# Altium PCB Main.PcbDoc
Units mil, origin at the board's own origin, x right, y up, seen from the top; angles counter-clockwise.
Board outline 3149.61 x 3937.01 mil, 2 copper layers (Top Layer, Bottom Layer); 50 components, 56 nets, 219 pads, 54 vias.
Unrouted connection lines stored in the file: 7.
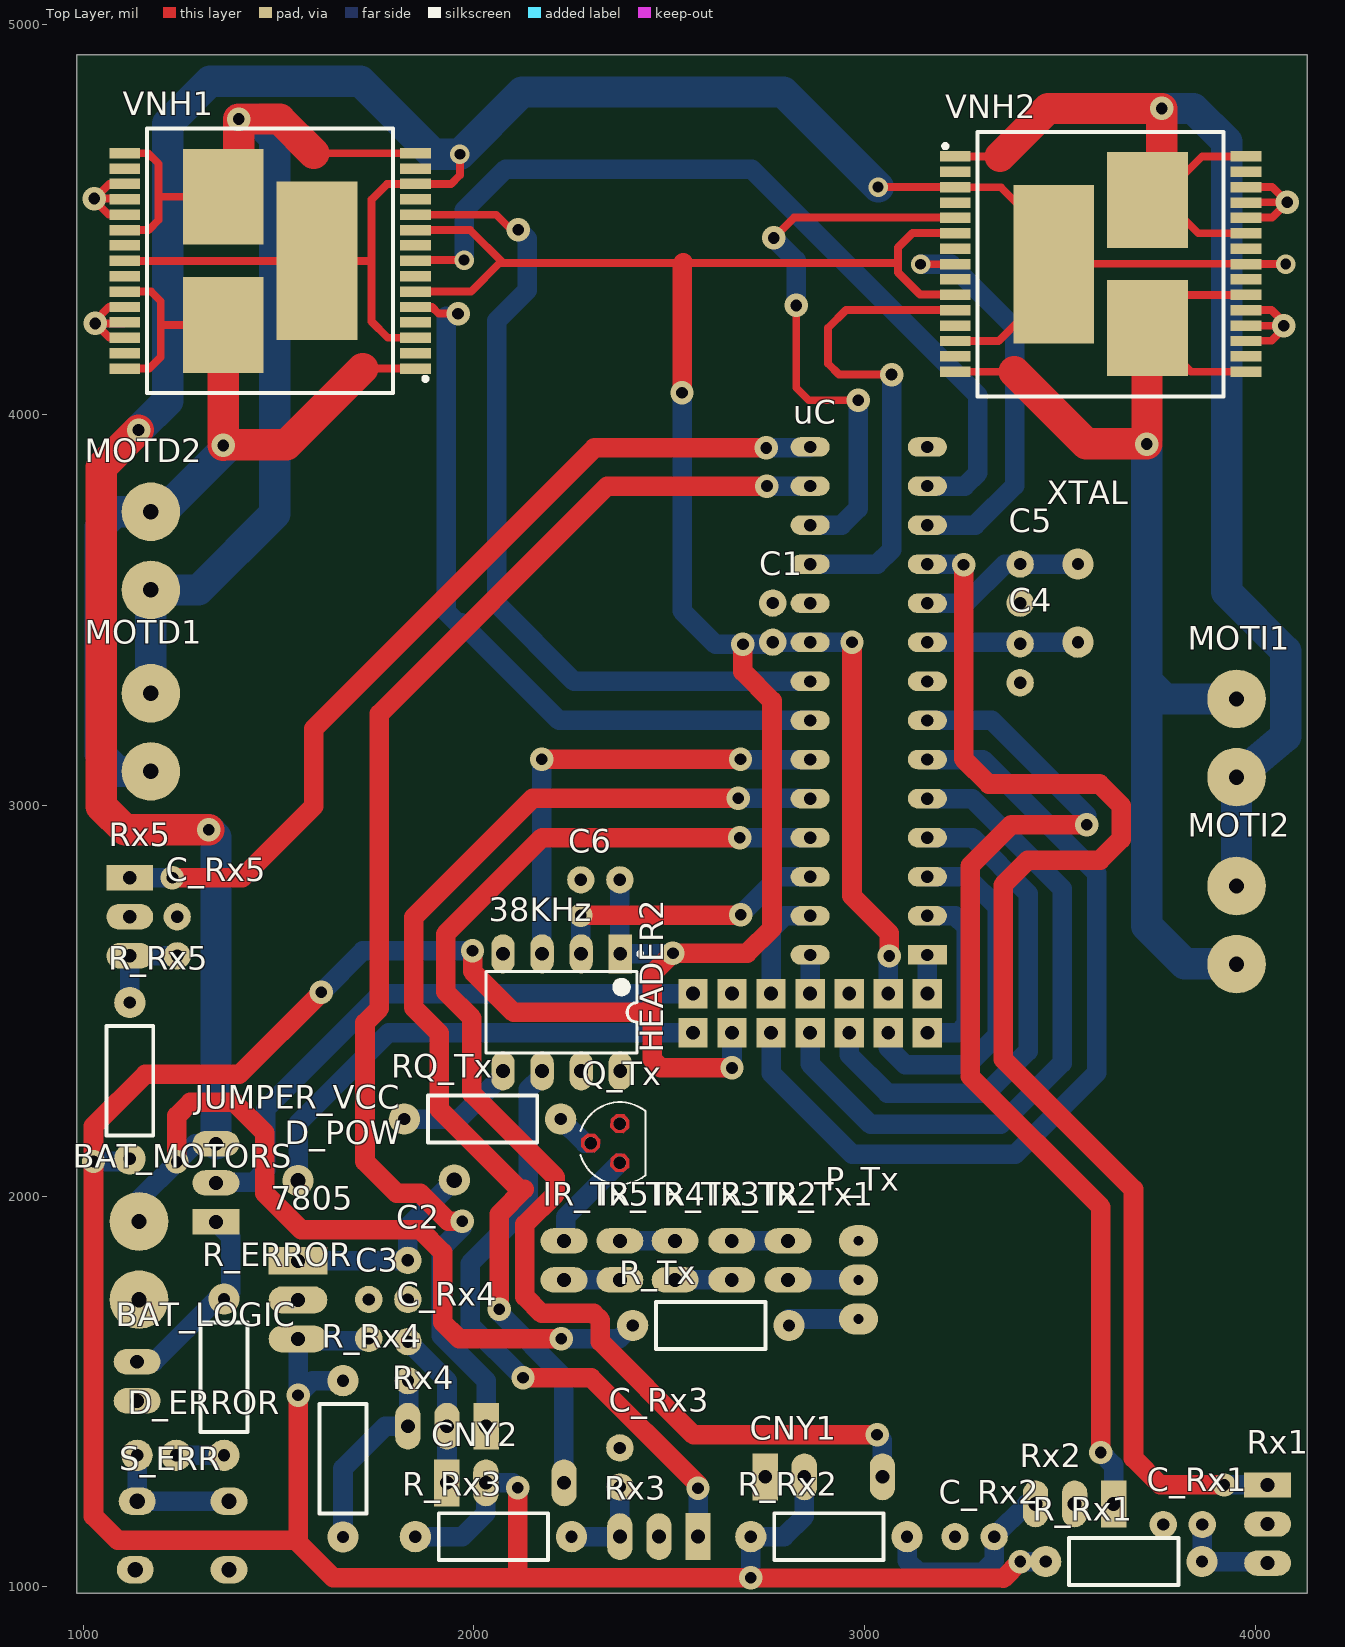
[diagram p0: Top Layer view]
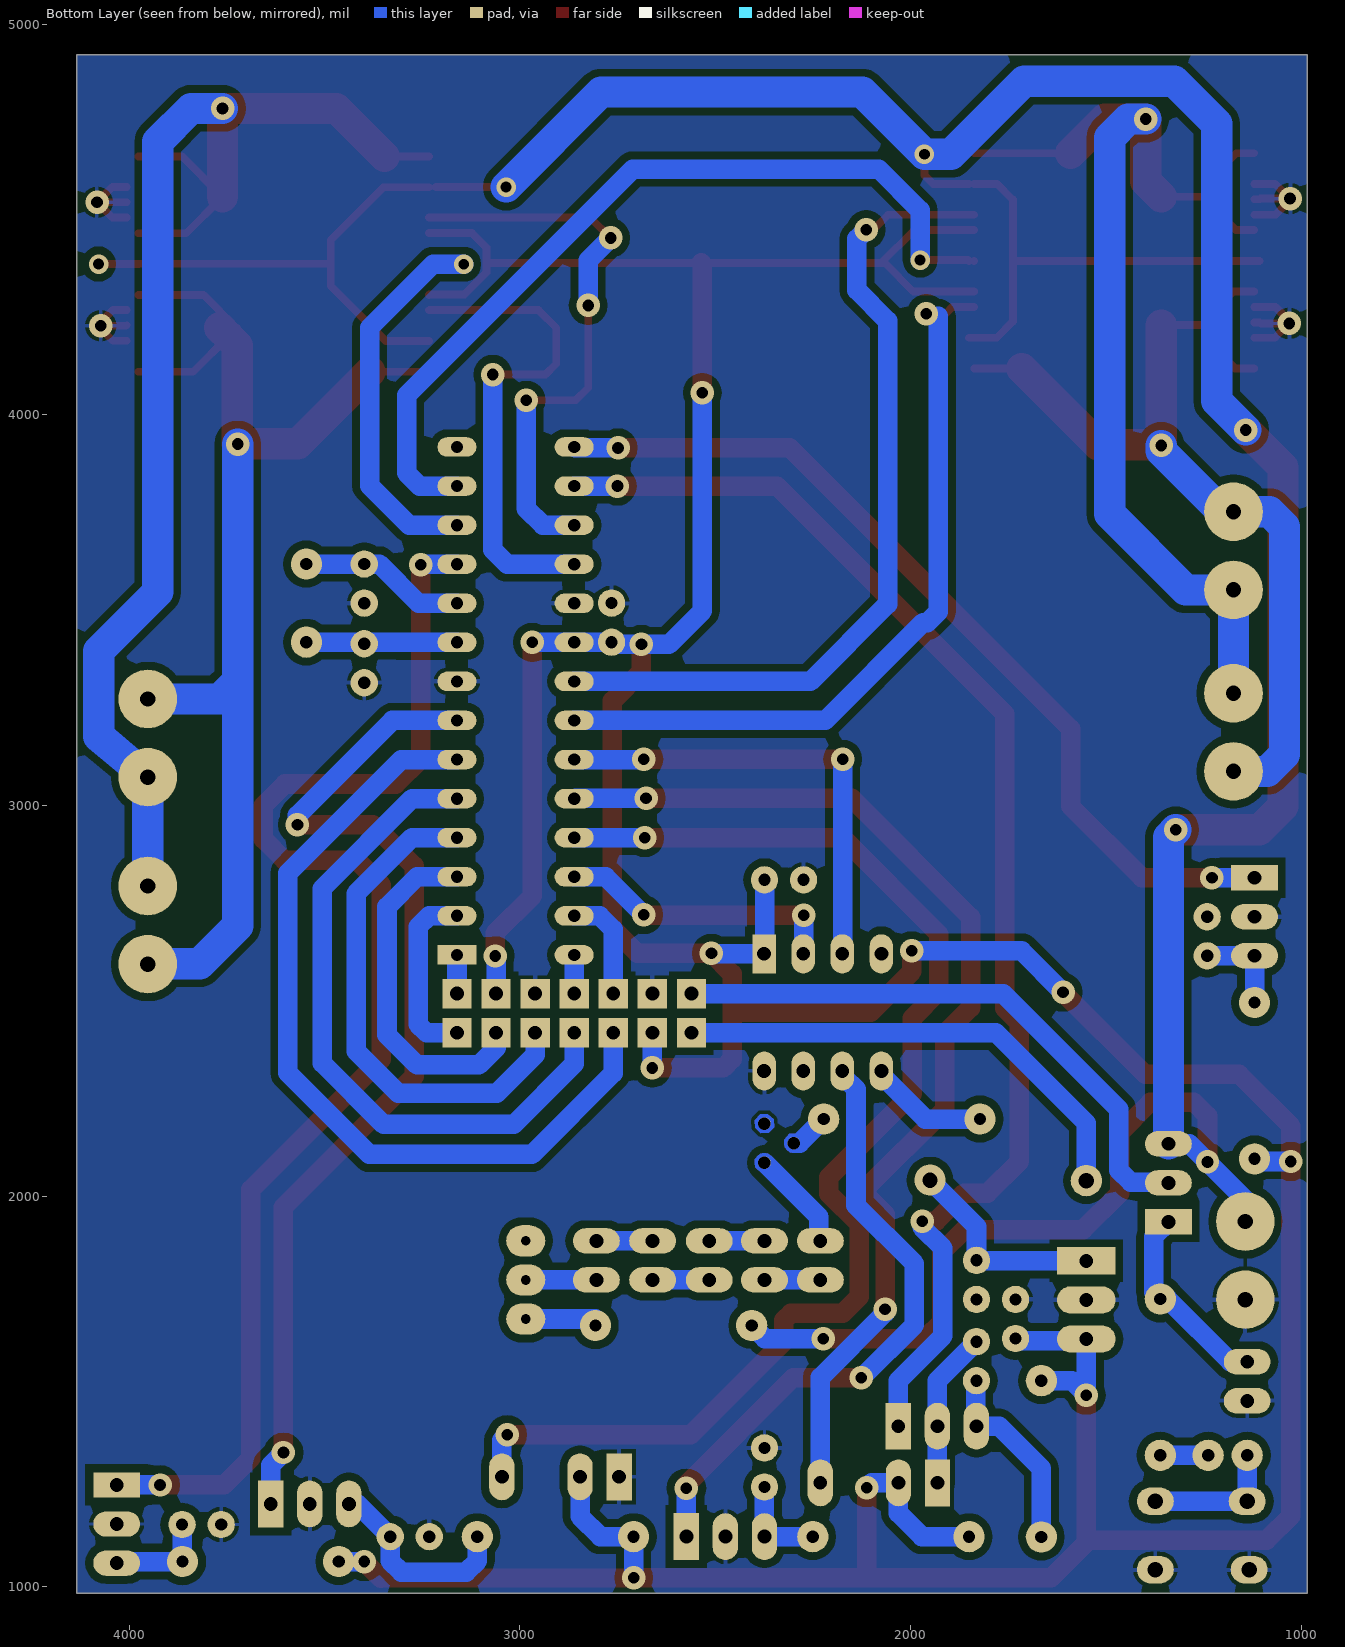
[diagram p1: Bottom Layer view, seen from below]

## Layer stack, top to bottom
Top Solder: solder mask 0.4, Solder Resist, Dk 3.5
Top Layer: signal copper 1.4
Dielectric 1: dielectric 12.6, FR-4, Dk 4.8
Bottom Layer: signal copper 1.4
Bottom Solder: solder mask 0.4, Solder Resist, Dk 3.5

## Board outline
984.25,984.25 4133.86,984.25 4133.86,4921.26 984.25,4921.26

## Design rules (kind name [scope] priority, off if disabled: settings)
Clearance [All] p1: gap=10 except(20: Arc-Poly Track-Poly SMDPad-Poly THPad-Poly Via-Poly Fill-Poly Poly-Poly)
PolygonConnect [All] p1: connectstyle=Relief reliefconductorwidth=10 reliefentries=4 polygonreliefangle="90 Angle" airgapwidth=10
RoutingVias [All] p1: holewidth=28 width=50 viastyle="Through Hole" minholewidth=28 minwidth=50 maxholewidth=28 maxwidth=50
SolderMaskExpansion [All] p1: expansion=4
Width [All] p1: maxlimit=1000 minlimit=10 preferedwidth=30
30 further rules are at their usual default settings.

## Components (designator, comment, footprint, x,y, rotation, side; value= is the part's Value field where it differs from the comment)
38KHz "PIC12F683-I/P" PDIP300-P8 2224.8,2470.47 r270 top
7805 "LM78XX" TO-220-STRAIGHT 1550.25,1834.65 r0 top
BAT_LOGIC "7,4v" "HEADER 1x2" 1138.44,1526.38 r0 top
BAT_MOTORS "11,1v" BLOCK_TERMINAL-2 698.31,1785.43 r0 top
C1 "CAP-CER" CAP-CER 2765.35,3453.15 r270 top
C2 "CAP-CER" CAP-CER 1831.35,1800.87 r90 top
C3 "CAP-CER" CAP-CER 1731.35,1670.87 r270 top
C4 "CAP-CER" CAP-CER 3398.42,3379.13 r90 top
C5 "CAP-CER" CAP-CER 3398.43,3583.11 r90 top
C6 "CAP-CER" CAP-CER 2339.02,2809.84 r0 top
C_Rx1 "CAP-CER" CAP-CER 3799.61,1159.84 r180 top
C_Rx2 "CAP-CER" CAP-CER 3266.89,1128.74 r180 top
C_Rx3 "CAP-CER" CAP-CER 2374.02,1320.87 r90 top
C_Rx4 "CAP-CER" CAP-CER 1831.5,1592.95 r90 top
C_Rx5 "CAP-CER" CAP-CER 1240.94,2680.35 r90 top
CNY1 "CNY_HEADER" CNY_HEADER 2896.06,1281.89 r90 top
CNY2 "CNY_HEADER" CNY_HEADER 2081.1,1266.54 r90 top
D_ERROR "LED" LED-3MM-RED 1188.44,1337.05 r0 top
D_POW "DIODE" DO-41 1775.24,2041.34 r180 top
HEADER2 "Header 2x7" "HEADER 2x7" 3161.02,2518.5 r270 top
IR_Tx1 "IR383" "HEADER 1x2" 2804.33,1835.83 r180 top
IR_Tx2 "IR383" "HEADER 1x2" 2660.24,1835.83 r0 top
IR_Tx3 "IR383" "HEADER 1x2" 2515.35,1835.83 r0 top
IR_Tx4 "IR383" "HEADER 1x2" 2374.02,1835.83 r180 top
IR_Tx5 "IR383" "HEADER 1x2" 2231.1,1835.83 r0 top
JUMPER_VCC "Header 1x3" "Header 1x3" 1340.16,1934.25 r180 top
MOTD1 "2-BLOCK_TERMINAL" BLOCK_TERMINAL-2 728.62,3137.4 r0 top
MOTD2 "2-BLOCK_TERMINAL" BLOCK_TERMINAL-2 728.62,3601.97 r0 top
MOTI1 "2-BLOCK_TERMINAL" BLOCK_TERMINAL-2 4397.36,3222.83 r180 top
MOTI2 "2-BLOCK_TERMINAL" BLOCK_TERMINAL-2 4397.36,2744.09 r180 top
P_Tx "POT" POT-10TURN 2985.04,1785.83 r90 top
Q_Tx "NPN" TO-92 2336.52,2135.83 r90 top
R_ERROR "RES" RES-Axial-400mil 1360.88,1337.05 r90 top
R_Rx1 "RES" RES-Axial-400mil 3463.78,1064.96 r0 top
R_Rx2 "RES" RES-Axial-400mil 2709.06,1128.74 r0 top
R_Rx3 "RES" RES-Axial-400mil 1850.39,1128.74 r0 top
R_Rx4 "RES" RES-Axial-400mil 1665.35,1527.95 r270 top
R_Rx5 "RES" RES-Axial-400mil 1119.68,2095.67 r90 top
R_Tx "RES" RES-Axial-400mil 2806.69,1669.29 r180 top
RQ_Tx "RES" RES-Axial-400mil 1822.44,2197.64 r0 top
Rx1 "Header 1x3" "Header 1x3" 4031.89,1261.02 r0 top
Rx2 "Header 1x3" "Header 1x3" 3637.8,1212.6 r270 top
Rx3 "Header 1x3" "Header 1x3" 2574.02,1128.74 r270 top
Rx4 "Header 1x3" "Header 1x3" 2031.5,1411.42 r270 top
Rx5 "Header 1x3" "Header 1x3" 1119.68,2815.35 r0 top
S_ERR "BUTTON_SMALL_4PIN" TACT_SWITCH-SMALL-4PIN 1353.58,1219.29 r180 top
uC "PIC18F2550" DIP28 3161.02,2617.72 r180 top
VNH1 "VNH2SP30-E" MULTIPOWER-SO-30 1478.74,4394.09 r90 top
VNH2 "VNH2SP30-E" MULTIPOWER-SO-30 3604.33,4385.83 r270 top
XTAL "XTAL" HC-49/S 3546.46,3538.11 r270 top

## Footprints (in the part's own frame and the unit in brackets; to place one, negate y for a bottom-side part, rotate by r counter-clockwise, add the part's x,y. Pads: shape width x height; smd on the part's side, far side on the other; paste and mask are expansions set on the pad)
BLOCK_TERMINAL-2 [mil]
  round 150 hole 39.37: 1(445,150) 2(445,-50)
  body extent 265,-147 580,247, height 400
CAP-CER [mil]
  round 70 hole 31.5: 1(-65,0) 2(35,0)
  body extent -107,-44 87,34, height 207
CNY_HEADER [mil]
  rect 120x65 hole 35.43: 1(0,150)
  oval 120x65 hole 35.43: 2(0,50) 3(0,-150)
  body extent -49,-200 49,200, height 336
DIP28 [mm]
  rect 2.54x1.27 hole 0.8: 1(0,0)
  oval 2.54x1.27 hole 0.8: 2(0,-2.54) 3(0,-5.08) 4(0,-7.62) 5(0,-10.16) 6(0,-12.7) 7(0,-15.24) 8(0,-17.78) 9(0,-20.32) 10(0,-22.86) 11(0,-25.4) 12(0,-27.94) 13(0,-30.48) 14(0,-33.02) 15(7.62,-33.02) 16(7.62,-30.48) 17(7.62,-27.94) 18(7.62,-25.4) 19(7.62,-22.86) 20(7.62,-20.32) 21(7.62,-17.78) 22(7.62,-15.24) 23(7.62,-12.7) 24(7.62,-10.16) 25(7.62,-7.62) 26(7.62,-5.08) 27(7.62,-2.54) 28(7.62,0)
  body extent -0.25,-33.76 7.65,0.89, height 5.09
DO-41 [mil]
  round 80 hole 39.37: A(224.99,1.45) K(-175,0)
  body extent -192,-52 242,55, height 107
HC-49/S [mil]
  round 80 hole 31.5: 1(-80,0) 2(120,0)
  body extent -203,-90 243,93, height 138
"HEADER 1x2" [mil]
  oval 120x65 hole 35.43: 1(0,50) 2(0,-50)
  body extent -49,-100 49,100, height 336
"Header 1x3" [mil]
  rect 120x65 hole 35.43: 1(0,0)
  oval 120x65 hole 35.43: 2(0,-100) 3(0,-200)
  body extent -49,-250 49,50, height 336
"HEADER 2x7" [mm]
  rect 1.905x1.905 hole 0.9: 1(0,0) 2(2.54,0) 3(0,-2.54) 4(2.54,-2.54) 5(0,-5.08) 6(2.54,-5.08) 7(0,-7.62) 8(2.54,-7.62) 9(0,-10.16) 10(2.54,-10.16) 11(0,-12.7) 12(2.54,-12.7) 13(0,-15.24) 14(2.54,-15.24)
  body extent -1.24,-16.51 3.78,1.27, height 8.54
LED-3MM-RED [mil]
  round 80 hole 31.5: A(-50,0) K(50,0)
  body extent -66,-65 64,65, height 217
MULTIPOWER-SO-30 [mm]
  rect 0.68x2 smd: 1(-7,-9.45) 2(-6,-9.45) 3(-5,-9.45) 4(-4,-9.45) 5(-3,-9.45) 6(-2,-9.45) 7(-1,-9.45) 8(0,-9.45) 9(1,-9.45) 10(2,-9.45) 11(3,-9.45) 12(4,-9.45) 13(5,-9.45) 14(6,-9.45) 15(7,-9.45) 16(7,9.45) 17(6,9.45) 18(5,9.45) 19(4,9.45) 20(3,9.45) 21(2,9.45) 22(1,9.45) 23(0,9.45) 24(-1,9.45) 25(-2,9.45) 26(-3,9.45) 27(-4,9.45) 28(-5,9.45) 29(-6,9.45) 30(-7,9.45)
  rect 6.23x5.25 smd: 31(-4.165,3.05) 32(4.165,3.05)
  rect 10.3x5.25 smd: 33(0,-3.05)
  silkscreen extent -8.6,-10.23 8.6,8
PDIP300-P8 [mil] "DIP, 8-Leads, Row Spacing 7.62mm, Pitch 2.54mm, Body 9.5x6.6mm"
  rect 100x60 hole 35.43: 1(-150,150)
  oval 100x60 hole 35.43: 2(-150,50) 3(-150,-50) 4(-150,-150) 5(150,-150) 6(150,-50) 7(150,50) 8(150,150)
  silkscreen extent -155,-193 104,206, body extent -140,-193 140,193, height 210
POT-10TURN [mil]
  oval 80x100 hole 25: 1(-100,0) 2(0,0) 3(100,0)
  body extent -188,-94 188,94, height 455
RES-Axial-400mil [mil]
  round 80 hole 31.5: 1(0,0) 2(400,0)
  silkscreen extent 60,-60 340,60, body extent -12,-44 410,44, height 94
TACT_SWITCH-SMALL-4PIN [mm]
  oval 2.4x1.8 hole 1: 1(-0.508,4.445) 1(5.588,4.445) 2(-0.508,0) 2(5.461,0)
  body extent -1.45,-0.79 6.53,5.21, height 5.15
TO-92 [mil]
  round 32 hole 32: B(0,37.5) C(-50,-37.5) E(50,-37.5)
  Top Layer region: -25.57,-28.61 -39.01,-13.94 -58.89,-13.07 -73.56,-26.51 -74.43,-46.39 -60.99,-61.06 -41.11,-61.93 -26.44,-48.49
  Top Layer region: 24.43,46.39 10.99,61.06 -8.89,61.93 -23.56,48.49 -24.43,28.61 -10.99,13.94 8.89,13.07 23.56,26.51
  Top Layer region: 74.43,-28.61 60.99,-13.94 41.11,-13.07 26.44,-26.51 25.57,-46.39 39.01,-61.06 58.89,-61.93 73.56,-48.49
  Bottom Layer region: -25.57,-28.61 -39.01,-13.94 -58.89,-13.07 -73.56,-26.51 -74.43,-46.39 -60.99,-61.06 -41.11,-61.93 -26.44,-48.49
  Bottom Layer region: 24.43,46.39 10.99,61.06 -8.89,61.93 -23.56,48.49 -24.43,28.61 -10.99,13.94 8.89,13.07 23.56,26.51
  Bottom Layer region: 74.43,-28.61 60.99,-13.94 41.11,-13.07 26.44,-26.51 25.57,-46.39 39.01,-61.06 58.89,-61.93 73.56,-48.49
  Multi-Layer region: -25.57,-28.61 -39.01,-13.94 -58.89,-13.07 -73.56,-26.51 -74.43,-46.39 -60.99,-61.06 -41.11,-61.93 -26.44,-48.49
  Multi-Layer region: 24.43,46.39 10.99,61.06 -8.89,61.93 -23.56,48.49 -24.43,28.61 -10.99,13.94 8.89,13.07 23.56,26.51
  Multi-Layer region: 74.43,-28.61 60.99,-13.94 41.11,-13.07 26.44,-26.51 25.57,-46.39 39.01,-61.06 58.89,-61.93 73.56,-48.49
  silkscreen extent -105,-102 105,63, body extent -95,-77 95,58, height 290
TO-220-STRAIGHT [mil]
  rect 150x70 hole 35.43: 1(0,0)
  oval 150x70 hole 35.43: 2(0,-100) 3(0,-200)
  body extent -64,-305 114,101, height 661

## Part data
38KHz: "Flash-Based 8-Bit CMOS Microcontroller with nanoWatt Technology, 2K (x14-Bit words) Program Memory, 384 Bytes Data Memory, 8-Pin PDIP, Industrial Temperature"
BAT_LOGIC IR_Tx1 IR_Tx2 IR_Tx3 IR_Tx4 IR_Tx5: library part "Header 1x2"
BAT_MOTORS: library part 2-BLOCK_TERMINAL
VNH1 VNH2: "H-Bridge Motor Driver 30A MultiPowerSO30 STMicroelectronics VNH2SP30-E, Half Bridge Motor Driver, Automotive, 30-Pin SOIC"

## Via types
v1: diameter 60, hole 30, Top Layer to Bottom Layer, 49 vias
v2: diameter 50, hole 28, Top Layer to Bottom Layer, 5 vias

## Nets (pads, with @x,y where several pads share a name; then routed paths per layer and width w, separated by ;. In a path a pad name is that pad's centre, name@x,y a point inside that pad or via, vN(x,y) a via of type N, cw(c..) or ccw(c..) an arc to the next point about the centre after c; other vN are vias at no path point)
5V: 38KHz.1 7805.3 C1.2 C3.2 C6.2 CNY1.2 CNY2.2 HEADER2.3 HEADER2.12 R_Rx1.1 R_Rx2.1 R_Rx3.1 R_Rx4.1 R_Rx5.1 uC.20 VNH1.6 VNH1.10 VNH2.6 VNH2.10 | length 13375
  Top Layer w20: VNH1.6@1837.01,4315.35 VNH1.6 1992.91,4315.35 2066.54,4388.98 2074.8,4388.98 ; VNH1.10@1837.01,4472.83 VNH1.10 1990.94,4472.83 2074.8,4388.98 ; VNH2.10 3231.5,4307.87 3142.13,4307.87 3085.83,4364.17 3085.83,4388.98 ; VNH2.6@3232.28,4465.35 3122.83,4465.35 3085.83,4428.35 3085.83,4388.98 ; 2074.8,4388.98 2536.42,4388.98 3085.83,4388.98
  Top Layer w50: v1(1550.25,1490.8) 1550.25,1113.53 ; v1(1609.84,2522.05) 1400,2312.2 1159.45,2312.2 1026.77,2179.53 v1(1026.77,2088.98) 1026.77,1181.5 1088.54,1119.72 1544.06,1119.72 1550.25,1113.53 ; v1(1996.85,2628.35) 1996.85,2575.59 2101.97,2470.47 2456.69,2470.47 ; v1(2112.6,1253.94) 2112.6,1023.23 ; v1(2533.07,4056.69) 2533.07,4385.63 2536.42,4388.98 ; v1(2661.02,2328.35) 2479.13,2328.35 2456.69,2350.79 2456.69,2470.47 ; v1(2688.98,3412.6) 2688.98,3342.52 2763.39,3268.11 2763.39,2685.83 2699.61,2622.05 v1(2509.84,2622.05) 2456.69,2568.9 2456.69,2470.47 ; v1(2968.11,3417.72) 2968.11,2768.9 3063.39,2673.62 v1(3063.39,2614.96) ; v1(3398.43,1064.96) 3355.51,1022.05 v1(2708.66,1023.23) 2112.6,1023.23 ; 1550.25,1113.53 1640.55,1023.23 2112.6,1023.23
  Bottom Layer w50: v1(1026.77,2088.98) 1112.99,2088.98 R_Rx5.1 ; v1(1609.84,2522.05) 1716.14,2628.35 v1(1996.85,2628.35) ; R_Rx4.1 1587.4,1527.95 v1(1550.25,1490.8) 7805.3 1554.64,1630.26 1725.74,1630.26 C3.2 C3.2@1731.35,1637.05 ; R_Rx3.1@1843.7,1122.05 R_Rx3.1 1970.87,1128.74 2031.1,1188.98 CNY2.2 2100,1266.54 v1(2112.6,1253.94) ; C6.2@2373.58,2809.84 2373.58,2621.69 38KHz.1 2508.27,2620.47 v1(2509.84,2622.05) ; v1(2533.07,4056.69) 2533.07,3498.43 2618.9,3412.6 v1(2688.98,3412.6) C1.2@2762.6,3412.6 ; v1@2659.84,2327.17 v1(2661.02,2328.35) HEADER2.12 ; v1(2708.66,1023.23) R_Rx2.1 2794.09,1128.74 2846.06,1180.71 CNY1.2 ; C1.2@2763.39,3411.81 C1.2@2762.6,3412.6 ; C1.2 2762.64,3420.87 C1.2@2759.49,3417.72 ; v1(2968.11,3417.72) uC.20 C1.2@2759.49,3417.72 ; HEADER2.3 3061.02,2612.6 v1(3063.39,2614.96) ; v1(3398.43,1064.96) R_Rx1.1 ; C1.2@2759.06,3416.14 2757.48,3417.72 C1.2@2759.49,3417.72 ; C1.2@2759.06,3416.14 2759.06,3417.28 C1.2@2759.49,3417.72 ; C1.2@2759.06,3416.14 C1.2@2762.6,3412.6
7V4: BAT_LOGIC.1 JUMPER_VCC.1 R_ERROR.2 | length 508.9
  Bottom Layer w50: BAT_LOGIC.1 1181.75,1576.38 1342.42,1737.05 R_ERROR.2 1377.95,1754.12 1377.95,1896.46 JUMPER_VCC.1
11V1: BAT_MOTORS.1 JUMPER_VCC.3 R_Tx.2 VNH1.3 VNH1.13 VNH1.23 VNH1.33 VNH2.3 VNH2.13 VNH2.23 VNH2.33 | length 10017.5
  Top Layer w20: VNH1.23 VNH1.33 1738.19,4394.09 ; VNH1.13@1837.01,4590.94 1778.35,4590.94 1738.19,4550.79 1738.19,4394.09 ; VNH1.3 1779.92,4197.24 1738.19,4238.98 1738.19,4394.09 ; VNH1.13 1942.13,4590.94 1964.57,4613.39 v2(1964.57,4666.93) ; v2(3035.04,4583.07) VNH2.3@3215.35,4583.07 ; VNH2.13 3343.31,4188.98 3484.25,4329.92 VNH2.33 VNH2.33@3484.25,4386.61 ; VNH2.3 3349.21,4582.68 3484.25,4447.64 VNH2.33@3484.25,4386.61 ; VNH2.23 v2(4078.35,4385.83) ; VNH2.23@4006.3,4386.61 VNH2.33@3484.25,4386.61
  Top Layer w50: v1(1240.16,2087.8) 1240.16,2205.91 1274.8,2240.55 1386.61,2240.55 1465.25,2161.91 1465.25,2007.58 1558.27,1914.57 1862.6,1914.57 1920.47,1856.69 1920.47,1677.56 1957.5,1640.54 1963.02,1635.04 1963.37,1635.39 2078.5,1635.39 ; 2078.5,1635.43 v1(2223.62,1635.43)
  Top Layer w80: v1(1142.13,3961.02) 1046.85,3865.75 1046.85,2998.03 1107.09,2937.8 v1(1321.65,2937.8)
  Bottom Layer w50: BAT_MOTORS.1@1138.44,1935.83 1144.88,1942.27 1144.88,1992.52 v1(1240.16,2087.8) 1286.61,2134.25 JUMPER_VCC.3 ; JUMPER_VCC.3@1358.13,2138.58 JUMPER_VCC.3@1360.88,2135.83 ; v1(2223.62,1635.43) 2372.83,1635.43 R_Tx.2
  Bottom Layer w80: v1(1142.13,3961.02) 1216.54,4035.43 1216.54,4744.88 1325.2,4853.54 1709.84,4853.54 1896.46,4666.93 v2(1964.57,4666.93) 2123.62,4825.98 2792.13,4825.98 v2(3035.04,4583.07) ; v1(1321.65,2937.8) 1340.16,2919.29 JUMPER_VCC.3
38KHZ: 38KHz.5 RQ_Tx.1 | length 309.2
  Bottom Layer w50: RQ_Tx.1 1962.2,2197.64 2074.8,2310.24 38KHz.5
BAT: HEADER2.13 JUMPER_VCC.2 | length 1512.1
  Bottom Layer w50: JUMPER_VCC.2@1340.16,2035.83 1436.22,2035.83 1467.32,2066.93 1467.32,2222.83 1762.99,2518.5 HEADER2.13
BTN1: HEADER2.4 uC.3 | length 906.5
  Bottom Layer w50: HEADER2.4 3061.02,2379.86 3104.88,2336 3263.17,2336 3340.16,2412.99 3340.16,2740.55 3262.99,2817.72 uC.3
BTN2: HEADER2.2 uC.2 | length 468.8
  Bottom Layer w50: HEADER2.2 3238.98,2418.5 3260.24,2439.76 3260.24,2689.76 3232.28,2717.72 uC.2
CNY1: CNY1.3 uC.25 | length 3304.6
  Top Layer w50: v1(2680.71,2917.72) 2174.8,2917.72 1927.95,2670.87 1927.95,2523.43 1995.28,2456.11 1995.28,2262.99 2209.06,2049.21 2209.06,2006.3 2131.1,1928.35 2131.1,1743.31 2173.98,1700.43 2306.65,1700.43 2324.33,1682.76 2324.33,1628.03 2562.99,1389.37 v1(3032.28,1389.37)
  Bottom Layer w50: v1(2680.71,2917.72) uC.25 ; v1(3032.28,1389.37) 3046.06,1375.59 CNY1.3
CNY2: CNY2.3 uC.24 | length 2794.1
  Top Layer w50: v1@2065.35,1712.2 2065.35,1954.52 2129.13,2018.3 2116.34,2018.3 1912.2,2222.44 1912.2,2416.93 1846.06,2483.07 1846.06,2713.78 2151.18,3018.9 v1(2677.17,3018.9)
  Bottom Layer w50: v1(2065.35,1710.63) 2065.35,1701.78 2230.71,1536.42 CNY2.3@2230.71,1275.2 ; v1(2677.17,3018.9) uC.24@2857.09,3018.9
GND: 38KHz.8 7805.2 BAT_LOGIC.2 BAT_MOTORS.2 C1.1 C2.1 C3.1 C4.1 C5.1 C6.1 C_Rx1.2 C_Rx2.2 C_Rx3.2 C_Rx4.2 C_Rx5.2 CNY1.1 CNY2.1 HEADER2.5 HEADER2.11 Q_Tx.E Rx1.2 Rx2.2 Rx3.2 Rx4.2 Rx5.2 S_ERR.1 uC.8 uC.19 VNH1.18 VNH1.19 VNH1.20 VNH1.26 VNH1.27 VNH1.28 VNH2.18 VNH2.19 VNH2.20 VNH2.26 VNH2.27 VNH2.28 | length 1523.8
  Top Layer w20: VNH1.28@1120.47,4197.24 VNH1.28 1067.72,4197.24 v1(1031.1,4233.86) ; VNH1.27@1120.47,4236.61 VNH1.27 1103.94,4233.86 v1(1031.1,4233.86) ; VNH1.26@1120.47,4275.98 VNH1.26 1066.14,4275.98 1031.1,4240.94 v1(1031.1,4233.86) ; VNH1.20@1120.47,4512.2 VNH1.20 1066.14,4512.2 1028.74,4549.61 v1(1028.74,4553.54) v1@1029.53,4553.54 ; VNH1.19@1120.47,4551.57 VNH1.19 1104.72,4553.54 v1@1029.53,4553.54 ; VNH1.18@1120.47,4590.94 VNH1.18 1066.93,4590.94 v1@1029.53,4553.54 ; VNH2.18@4006.3,4189.76 4041.73,4189.76 4072.83,4220.87 v1(4072.83,4227.95) ; VNH2.19@4006.3,4229.13 4007.48,4227.95 v1(4072.83,4227.95) ; VNH2.20@4006.3,4268.5 4041.73,4268.5 4072.83,4237.4 v1(4072.83,4227.95) ; VNH2.26@4006.3,4504.72 4042.91,4504.72 v1(4082.28,4544.09) ; VNH2.27@4006.3,4544.09 v1(4082.28,4544.09) ; VNH2.28@4006.3,4583.46 4042.91,4583.46 v1(4082.28,4544.09)
  Bottom Layer w50: C_Rx4.2 1931.5,1527.95 Rx4.2 1931.5,1266.93 CNY2.1 ; HEADER2.11@2659.84,2519.68 HEADER2.11
IR1: Rx1.1 uC.11 | length 3456.3
  Top Layer w50: v1(3253.62,3616.54) 3253.62,3119.61 3318.11,3055.12 3601.57,3055.12 3656.69,3000 3656.69,2913.78 3603.15,2860.24 3418.5,2860.24 3354.72,2796.46 3354.72,2351.18 3688.58,2017.32 3688.58,1329.53 3757.09,1261.02 v1(3920.87,1261.02)
  Bottom Layer w50: uC.11 3252.44,3617.72 v1(3253.62,3616.54) ; v1(3920.87,1261.02) Rx1.1
IR2: Rx2.1 uC.7 | length 2660
  Top Layer w50: v1(3569.29,2951.18) 3376.38,2951.18 3270.47,2845.28 3270.47,2307.09 3605.12,1972.44 v1(3605.12,1344.09)
  Bottom Layer w50: uC.7 3326.38,3217.72 3569.29,2974.8 v1(3569.29,2951.18) ; v1(3605.12,1344.09) 3637.8,1311.42 Rx2.1
IR3: 38KHz.6 Rx3.1 | length 1590.5
  Top Layer w50: v1(2125.98,1535.43) 2300.51,1535.43 2574.02,1261.93 v1(2574.02,1252.76)
  Bottom Layer w50: v1(2125.98,1535.43) 1990.55,1670.87 1990.55,1827.56 2139.8,1976.81 2139.8,2274.06 38KHz.6@2167.72,2301.97 ; Rx3.1 v1(2574.02,1252.76)
IR3_COPY: 38KHz.2 uC.26 | length 728.3
  Top Layer w50: v1(2273.62,2719.29) v1@2683.07,2719.29
  Bottom Layer w50: v1(2273.62,2719.29) 2273.62,2624.8 2276.38,2622.05 38KHz.2 ; v1(2683.07,2720.47) 2780.31,2817.72 uC.26
IR4: Rx4.1 uC.16 | length 3411.1
  Top Layer w50: v1(1970.47,1936.22) 1934.65,1936.22 1862.99,2007.87 1802.76,2007.87 1721.65,2088.98 1721.65,2443.7 1758.66,2480.71 1758.66,3234.65 2341.73,3817.72 v1(2750.39,3817.72)
  Bottom Layer w50: v1(1970.47,1936.22) 1970.47,1920.47 1917.32,1867.32 1917.32,1642.52 2031.5,1528.35 Rx4.1 ; v1(2750.39,3817.72) uC.16
IR5: Rx5.1 uC.15 | length 2314.4
  Top Layer w50: v1(1228.74,2815.35) 1407.87,2815.35 1590.16,2997.64 1590.16,3196.46 2309.06,3915.35 v1(2748.82,3915.35)
  Bottom Layer w50: Rx5.1 v1(1228.74,2815.35) ; v1(2748.82,3915.35) 2858.66,3915.35 uC.15
IR_SWITCH: 38KHz.3 uC.23 | length 1185.4
  Top Layer w50: v1(2174.02,3118.5) v1(2682.68,3118.5)
  Bottom Layer w50: 38KHz.3@2174.02,2620.47 v1(2174.02,3118.5) ; v1(2682.68,3118.5) 2683.47,3117.72 uC.23
LED1: HEADER2.10 uC.6 | length 2173.5
  Bottom Layer w50: HEADER2.10 2761.02,2315.35 2969.29,2107.09 3385.43,2107.09 3594.09,2315.75 3594.09,2826.77 3303.15,3117.72 uC.6
LED2: HEADER2.8 uC.5 | length 1740.7
  Bottom Layer w50: HEADER2.8 2861.02,2338.58 3015.75,2183.86 3348.82,2183.86 3505.91,2340.94 3505.91,2787.4 3275.59,3017.72 uC.5
LED3: HEADER2.6 uC.4 | length 1320
  Bottom Layer w50: HEADER2.6 2961.02,2361.81 3058.66,2264.17 3311.81,2264.17 3418.9,2371.26 3418.9,2774.8 3275.98,2917.72 uC.4
MCLR: HEADER2.1 uC.1 | length 99.2
  Bottom Layer w50: HEADER2.1 uC.1
MOT1A: MOTD1.2 MOTD2.1 VNH1.1 VNH1.25 VNH1.30 VNH1.31 | length 2491
  Top Layer w20: VNH1.30@1120.47,4118.5 1169.68,4118.5 1199.02,4147.83 1199.02,4230.12 ; VNH1.25@1120.47,4315.35 1174.41,4315.35 1199.02,4290.75 1199.02,4230.12 ; v1(1358.66,3921.65) v1@1360.24,3923.23 ; VNH1.31 1199.02,4230.12 ; 1715.75,4118.5 VNH1.1@1837.01,4118.5
  Top Layer w80: v1(1358.66,3921.65) VNH1.31 ; v1@1360.24,3923.23 1520.47,3923.23 1715.75,4118.5
  Bottom Layer w80: MOTD1.2 1087.4,3087.4 1043.31,3131.5 1043.31,3713.78 1081.5,3751.97 MOTD2.1 1203.15,3751.97 1358.66,3907.48 v1(1358.66,3921.65)
MOT1B: MOTD1.1 MOTD2.2 VNH1.15 VNH1.16 VNH1.21 VNH1.32 | length 2903.7
  Top Layer w20: VNH1.21@1120.47,4472.83 1167.32,4472.83 1193.5,4499.02 1193.5,4558.07 ; VNH1.16@1120.47,4669.69 1166.14,4669.69 1193.5,4642.32 1193.5,4558.07 ; VNH1.32 1193.5,4558.07 ; 1590.55,4669.69 VNH1.15@1837.01,4669.69
  Top Layer w80: VNH1.32 1398.43,4597.83 v1(1398.43,4757.09) 1503.15,4757.09 1590.55,4669.69
  Bottom Layer w80: MOTD1.1 MOTD2.2 1295.67,3551.97 1490.55,3746.85 1490.55,4709.45 1442.91,4757.09 v1(1398.43,4757.09)
MOT2A: MOTI1.1 MOTI2.2 VNH2.1 VNH2.25 VNH2.30 VNH2.31 | length 3545.7
  Top Layer w20: VNH2.1 3346.85,4661.42 ; VNH2.25 3854.13,4464.57 3761.02,4557.68 3864.76,4661.42 VNH2.30
  Top Layer w80: 3346.85,4661.42 3469.69,4784.25 v1(3761.02,4784.25) VNH2.31@3761.02,4557.68
  Bottom Layer w80: v1(3761.02,4784.25) 3841.73,4784.25 3927.17,4698.82 3927.17,3546.46 4077.95,3395.67 4077.95,3177.43 3965.7,3083.65 MOTI1.1@3952.76,3072.83 ; MOTI2.2 MOTI1.1
MOT2B: MOTI1.2 MOTI2.1 VNH2.15 VNH2.16 VNH2.21 VNH2.32 | length 3219.9
  Top Layer w20: VNH2.15 3383.46,4110.24 ; VNH2.16 3836.02,4110.24 3745.87,4200.39 VNH2.32 3809.65,4307.09 VNH2.21
  Top Layer w80: 3383.46,4110.24 3567.72,3925.98 3723.23,3925.98 3723.23,4177.76 3745.87,4200.39 VNH2.32@3768.11,4222.64
  Bottom Layer w80: v1(3722.44,3925.2) 3722.44,3318.9 ; MOTI2.1@3952.36,2595.28 3819.69,2595.28 3722.44,2692.52 3722.44,3318.9 ; MOTI1.2 3768.5,3272.83 3722.44,3318.9
Net7805_1: 7805.1 C2.2 D_POW.K | length 536.3
  Bottom Layer w50: 7805.1 1830.13,1834.65 C2.2 1831.35,1922.45 D_POW.K
NetC_Rx1_1: C_Rx1.1 R_Rx1.2 Rx1.3 | length 265
  Bottom Layer w50: C_Rx1.1 3864.61,1065.79 R_Rx1.2 4027.95,1064.96 Rx1.3
NetC_Rx2_1: C_Rx2.1 R_Rx2.2 Rx2.3 | length 511.1
  Bottom Layer w50: R_Rx2.2 3109.06,1066.93 3137.8,1038.19 3303.54,1038.19 3331.89,1066.54 C_Rx2.1 3415.75,1212.6 Rx2.3
NetC_Rx3_1: C_Rx3.1 R_Rx3.2 Rx3.3 | length 250.7
  Bottom Layer w50: R_Rx3.2 Rx3.3 C_Rx3.1
NetC_Rx4_1: C_Rx4.1 R_Rx4.2 Rx4.3 | length 504.5
  Bottom Layer w50: R_Rx4.2 1665.35,1303.15 1773.62,1411.42 Rx4.3 1831.5,1444.44 1833.62,1446.56 1833.62,1525.83 C_Rx4.1
NetC_Rx5_1: C_Rx5.1 R_Rx5.2 Rx5.3 | length 240.9
  Bottom Layer w50: R_Rx5.2 Rx5.3 C_Rx5.1
NetD1_K: 
NetD2_K: 
NetD3_K: 
NetD_ERROR_A: D_ERROR.A S_ERR.2 | length 352.8
  Bottom Layer w50: D_ERROR.A 1138.58,1336.9 1138.58,1219.29 S_ERR.2@1373.58,1219.29
NetD_ERROR_K: D_ERROR.K R_ERROR.1 | length 122.4
  Bottom Layer w50: D_ERROR.K R_ERROR.1
NetIR_Tx1_1: IR_Tx1.1 P_Tx.2 | length 180.7
  Bottom Layer w50: IR_Tx1.1 P_Tx.2
NetIR_Tx1_2: IR_Tx1.2 IR_Tx2.1 | length 144.1
  Bottom Layer w50: IR_Tx2.1 IR_Tx1.2
NetIR_Tx2_2: IR_Tx2.2 IR_Tx3.2 | length 144.9
  Bottom Layer w50: IR_Tx3.2 IR_Tx2.2
NetIR_Tx3_1: IR_Tx3.1 IR_Tx4.2 | length 141.3
  Bottom Layer w50: IR_Tx4.2 IR_Tx3.1
NetIR_Tx4_1: IR_Tx4.1 IR_Tx5.2 | length 142.9
  Bottom Layer w50: IR_Tx5.2 IR_Tx4.1
NetIR_Tx5_1: IR_Tx5.1 Q_Tx.C | length 257.6
  Bottom Layer w50: IR_Tx5.1@2235.04,1885.83 2235.04,1946.85 Q_Tx.C
NetP_Tx_1: P_Tx.1 R_Tx.1 | length 178.3
  Bottom Layer w50: R_Tx.1@2806.69,1685.83 P_Tx.1
NetQ_Tx_B: Q_Tx.B RQ_Tx.2 | length 102.2
  Bottom Layer w50: RQ_Tx.2 2284.25,2135.83 Q_Tx.B
PGC: HEADER2.9 uC.27 | length 278.9
  Bottom Layer w50: HEADER2.9 2761.02,2683.07 2795.67,2717.72 uC.27
PGD: HEADER2.7 uC.28 | length 99.2
  Bottom Layer w50: HEADER2.7 uC.28
PIN_M1A: uC.22 VNH1.5 | length 1932.7
  Top Layer w20: VNH1.5@1837.01,4275.98 VNH1.5 1893.31,4275.98 1910.24,4259.06 v1(1959.84,4259.06)
  Bottom Layer w50: 1929.13,4251.97 1929.13,3496.46 1957.32,3468.27 1967.95,3468.27 2218.5,3217.72 uC.22
PIN_M1B: uC.21 VNH1.11 | length 2170.4
  Top Layer w20: VNH1.11@1837.01,4512.2 VNH1.11 2057.48,4512.2 2095.67,4474.02 v1(2113.78,4474.02)
  Bottom Layer w50: 2058.66,4240.55 2137.4,4319.29 2137.4,4450.39 v1(2113.78,4474.02) ; 2059.06,4233.46 2059.06,3515.35 2256.69,3317.72 uC.21
PIN_M2A: uC.17 VNH2.5 | length 1482.6
  Top Layer w20: v1(2767.72,4452.76) 2819.68,4504.72 VNH2.5@3232.28,4504.72 ; v1(2825.2,4279.92) 2825.2,4069.68 2857.48,4037.4 v1(2983.86,4037.4)
  Bottom Layer w50: v1(2767.72,4452.76) 2825.2,4395.28 v1(2825.2,4279.92) ; uC.17 2941.34,3717.72 2983.86,3760.24 v1(2983.86,4037.4)
PIN_M2B: uC.18 VNH2.11 | length 1282.4
  Top Layer w20: v1(3069.29,4103.15) 2934.65,4103.15 2907.09,4130.71 2907.09,4222.83 2952.76,4268.5 3231.5,4268.5 VNH2.11
  Bottom Layer w50: uC.18 3032.68,3617.72 3069.29,3654.33 v1(3069.29,4103.15)
PWM1: uC.13 VNH1.8 | length 2192.9
  Top Layer w20: VNH1.8 1852.77,4396.06 v2(1975.59,4396.06)
  Bottom Layer w50: v2(1975.59,4396.06) 1975.59,4523.23 2081.5,4629.13 2711.02,4629.13 3290.16,4050 3290.16,3851.18 3256.69,3817.72 uC.13
PWM2: uC.12 VNH2.8 | length 1067.8
  Top Layer w20: v2(3143.7,4385.43) 3228.74,4385.43 3230.71,4387.4 VNH2.8
  Bottom Layer w50: v2(3143.7,4385.43) 3222.05,4385.43 3384.65,4222.83 3384.65,3818.9 3283.46,3717.72 uC.12
V_SWITCH: D_POW.A HEADER2.14 | length 1253.7
  Bottom Layer w50: D_POW.A 1550.25,2186.87 1781.89,2418.5 HEADER2.14
VCC: 
XTAL1: C4.2 uC.9 XTAL.2 | length 385.6
  Bottom Layer w50: uC.9 3314.57,3417.72 3314.96,3418.11 XTAL.2
XTAL2: C5.2 uC.10 XTAL.1 | length 427.6
  Bottom Layer w50: uC.10 3259.05,3517.72 3359.45,3618.11 C5.2 ; C5.2 XTAL.1 XTAL.1@3546.06,3618.5
pads on no net: 38KHz.4 38KHz.7 P_Tx.3 uC.14 VNH1.2 VNH1.4 VNH1.7 VNH1.9 VNH1.12 VNH1.14 VNH1.17 VNH1.22 VNH1.24 VNH1.29 VNH2.2 VNH2.4 VNH2.7 VNH2.9 VNH2.12 VNH2.14 VNH2.17 VNH2.22 VNH2.24 VNH2.29

## Polygon pours and split planes (outlines as drawn)
GND on Bottom Layer "Top Layer-No Net" (solid, remove dead copper, pour order 6): 984.25,984.25 4133.86,984.25 4133.86,4921.26 984.25,4921.26

## Silkscreen, mask and mechanical layers (free items; w line width, h text height)
Mechanical 1:
  the board outline again, w20